# EAGLE board board1 (EAGLE 9.6.2)
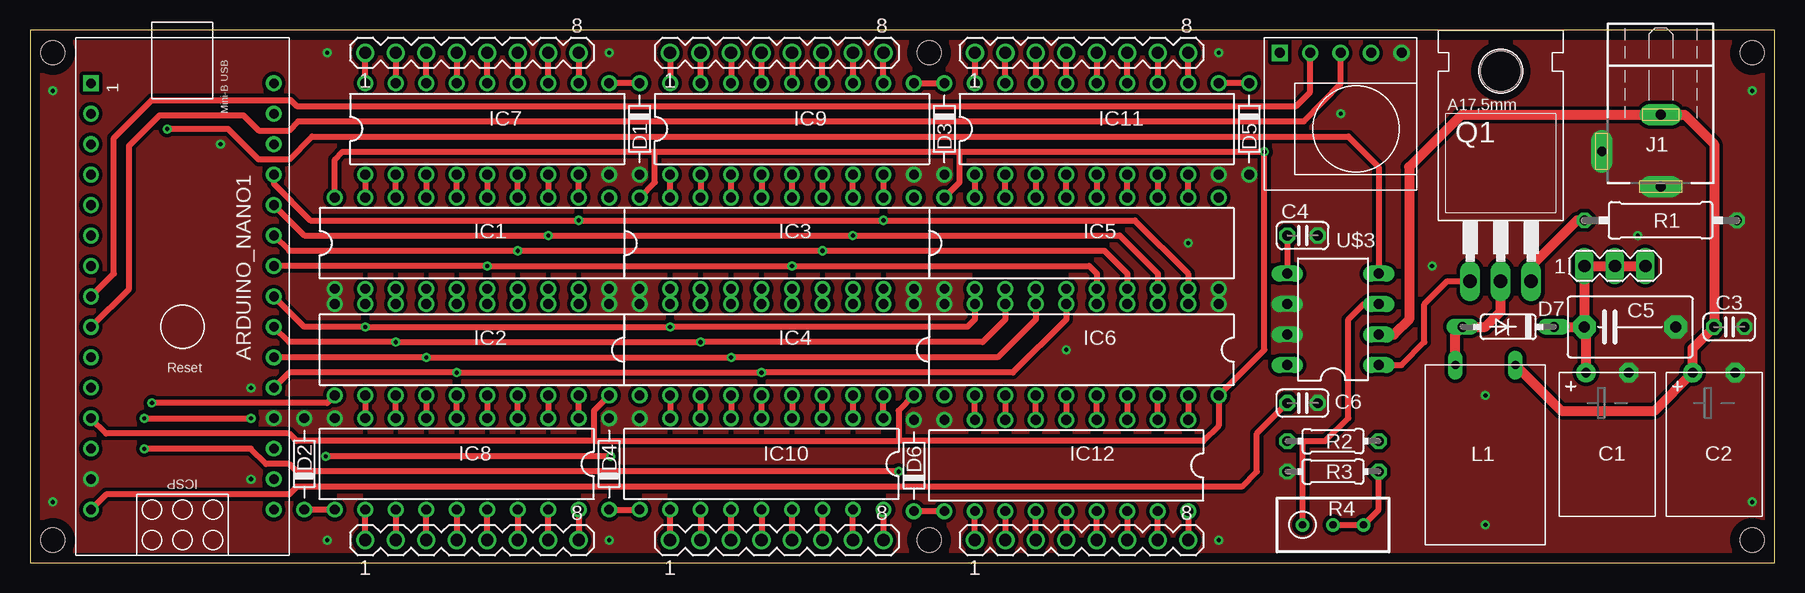
[diagram p0: board, top side]
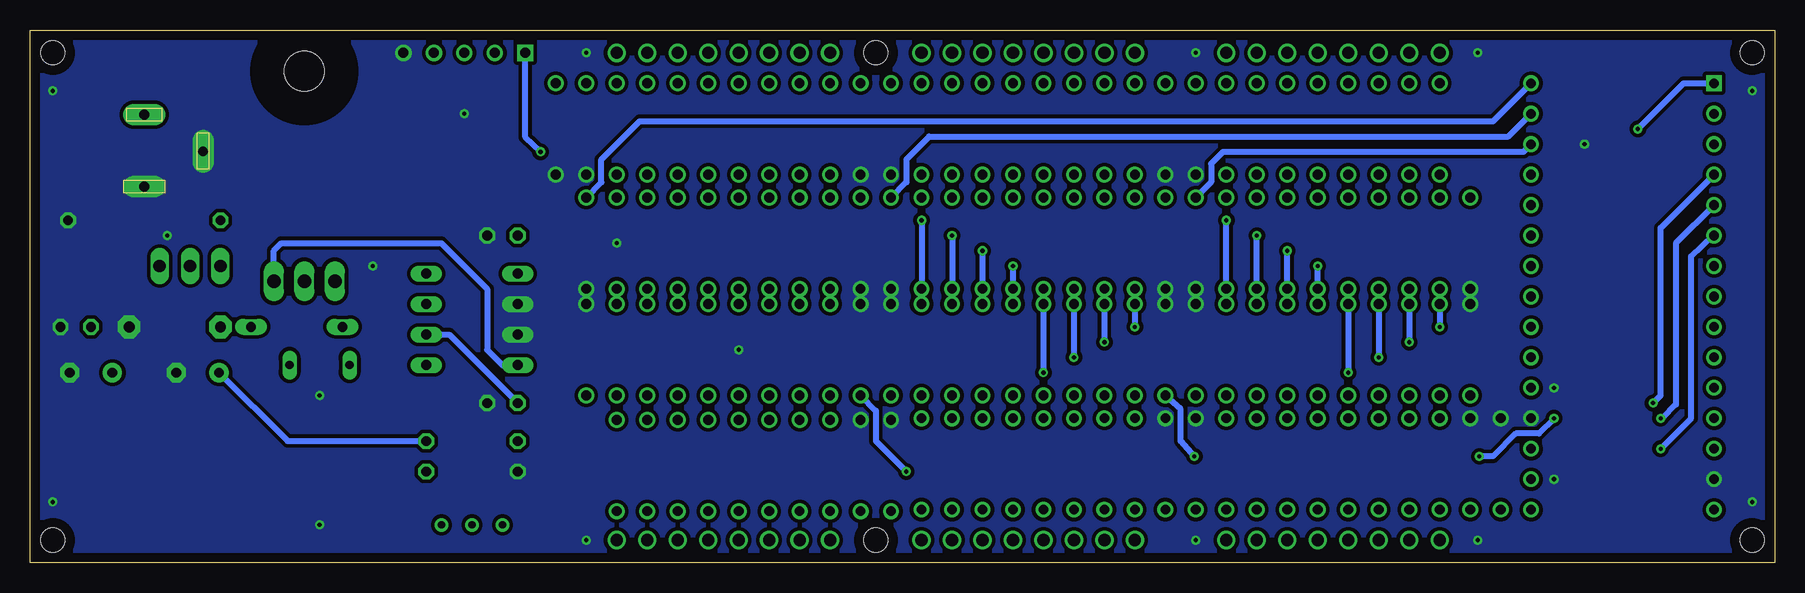
[diagram p1: board, bottom side, seen from below]

Size 145.41 x 44.45 mm. Coordinates in mm from the lower left corner, seen from the top.
Outline: 0,0 145.41,0 145.41,44.45 0,44.45 0,0
Copper layers (1*16): Top 0.035mm / dielectric 1.5mm / Bottom 0.035mm
Design rules "default *": minimum track width 6mil, minimum drill 0.35mm, track to track 6mil, track to pad 6mil, pad to pad 6mil, via to via 6mil, smd to smd 6mil, copper to edge 32mil, drill to drill 6mil, minimum pad ring 10mil, minimum via ring 8mil, stop-mask expansion 4mil, vias tented up to drill 0mil, thermal gap 10mil
Holes 2 mm at 1.91,1.91 1.91,42.55 143.51,42.55 143.51,1.91 74.93,42.55 74.93,1.91

## Footprints (pad centres in the part's own frame; a part is rotated, then mirrored left to right if it is on the bottom)
ARDUINO_NANO = drill 0.8 square: 1 -20.32,-7.62 | drill 0.8: 2 -17.78,-7.62; 3 -15.24,-7.62; 4 -12.7,-7.62; 5 -10.16,-7.62; 6 -7.62,-7.62; 7 -5.08,-7.62; 8 -2.54,-7.62; 9 0,-7.62; 10 2.54,-7.62; 11 5.08,-7.62; 12 7.62,-7.62; 13 10.16,-7.62; 14 12.7,-7.62; 15 15.24,-7.62; 16 15.24,7.62; 17 12.7,7.62; 18 10.16,7.62; 19 7.62,7.62; 20 5.08,7.62; 21 2.54,7.62; 22 0,7.62; 23 -2.54,7.62; 24 -5.08,7.62; 25 -7.62,7.62; 26 -10.16,7.62; 27 -12.7,7.62; 28 -15.24,7.62; 29 -17.78,7.62; 30 -20.32,7.62
E3,5-8 = drill 0.813 pad 1.6: + -1.778,0 | drill 0.813 pad 1.6 octagon: - 1.778,0
C025-024X044 = drill 0.813 octagon: 1 -1.27,0; 2 1.27,0
C7.5B5 = drill 0.914 pad 1.905 octagon: 1 -3.81,0; 2 3.81,0
D-7.5 = drill 0.813: A 3.81,0; C -3.81,0
DO35-7 = drill 0.813 long: A 3.81,0; C -3.81,0
DIL20 = drill 0.813: 1 -11.43,-3.81; 2 -8.89,-3.81; 3 -6.35,-3.81; 4 -3.81,-3.81; 5 -1.27,-3.81; 6 1.27,-3.81; 7 3.81,-3.81; 8 6.35,-3.81; 9 8.89,-3.81; 10 11.43,-3.81; 11 11.43,3.81; 12 8.89,3.81; 13 6.35,3.81; 14 3.81,3.81; 15 1.27,3.81; 16 -1.27,3.81; 17 -3.81,3.81; 18 -6.35,3.81; 19 -8.89,3.81; 20 -11.43,3.81
DIL18 = drill 0.813: 1 -10.16,-3.81; 2 -7.62,-3.81; 3 -5.08,-3.81; 4 -2.54,-3.81; 5 0,-3.81; 6 2.54,-3.81; 7 5.08,-3.81; 8 7.62,-3.81; 9 10.16,-3.81; 10 10.16,3.81; 11 7.62,3.81; 12 5.08,3.81; 13 2.54,3.81; 14 0,3.81; 15 -2.54,3.81; 16 -5.08,3.81; 17 -7.62,3.81; 18 -10.16,3.81
NEB21R = drill 0.813 pad 1.778 long: 1 0,7.35; 2 4.9,4.4; 3 0,1.35
BS11 = drill 0.7 long: 1 -2.5,0; 2 2.5,0
TO220 = drill 1.118 long: 1 -2.54,-6.35; 2 0,-6.35; 3 2.54,-6.35 | hole 3.302: 0,11.176
0309/12 = drill 0.813 octagon: 1 -6.35,0; 2 6.35,0
0204/7 = drill 0.813 octagon: 1 -3.81,0; 2 3.81,0
RTRIM3296W = drill 0.61: 1 0,-2.54; 2 0,0; 3 0,2.54
MA08-1 = drill 1.016: 1 -8.89,0; 2 -6.35,0; 3 -3.81,0; 4 -1.27,0; 5 1.27,0; 6 3.81,0; 7 6.35,0; 8 8.89,0
MA03-1 = drill 1.016 long: 1 -2.54,0; 2 0,0; 3 2.54,0
DS3231_MINI_MODULE = drill 0.85 square: 1 5.08,-5.08 | drill 0.85: 2 2.54,-5.08; 3 0,-5.08; 4 -2.54,-5.08; 5 -5.08,-5.08
DIL08 = drill 0.813 long: 1 -3.81,-3.81; 2 -1.27,-3.81; 3 1.27,-3.81; 4 3.81,-3.81; 5 3.81,3.81; 6 1.27,3.81; 7 -1.27,3.81; 8 -3.81,3.81

## Placement (x,y rotation side)
ARDUINO_NANO1  [ARDUINO_NANO]  12.7,19.68 270 top
C1  [E3,5-8]  131.44,15.88 180 bottom
C2  [E3,5-8]  140.34,15.88 180 bottom
C3  [C025-024X044]  141.6,19.68 0 top
C4  [C025-024X044]  106.05,27.3 0 top
C5  [C7.5B5]  133.35,19.68 0 top
C6  [C025-024X044]  106.05,13.34 0 top
D1  [D-7.5]  50.8,36.2 270 top
D2  [D-7.5]  22.86,8.26 90 top
D3  [D-7.5]  76.2,36.2 270 top
D4  [D-7.5]  48.26,8.26 90 top
D5  [D-7.5]  101.6,36.2 270 top
D6  [D-7.5]  73.66,8.13 90 top
D7  [DO35-7]  123.19,19.68 180 top
IC1  74HC573N  [DIL20]  36.83,26.67 0 top
IC2  74HC573N  [DIL20]  36.83,17.78 180 top
IC3  74HC573N  [DIL20]  62.23,26.67 0 top
IC4  74HC573N  [DIL20]  62.23,17.78 180 top
IC5  74HC573N  [DIL20]  87.63,26.67 0 top
IC6  74HC573N  [DIL20]  87.63,17.78 180 top
IC7  [DIL18]  38.1,36.2 0 top
IC8  [DIL18]  35.56,8.26 180 top
IC9  [DIL18]  63.5,36.2 0 top
IC10  [DIL18]  60.96,8.26 180 top
IC11  [DIL18]  88.9,36.2 0 top
IC12  [DIL18]  86.36,8.13 180 top
J1  NEB21R  [NEB21R]  135.89,38.73 180 top
L1  [BS11]  121.28,16.51 180 top
Q1  IRF620  [TO220]  122.56,29.84 0 top
R1  [0309/12]  135.89,28.57 180 top
R2  1M5  [0204/7]  108.58,10.16 0 top
R3  10k  [0204/7]  108.58,7.62 0 top
R4  5k  [RTRIM3296W]  108.58,3.17 270 top
SV1  [MA08-1]  36.83,42.55 0 top
SV2  [MA08-1]  36.83,1.91 0 top
SV3  [MA08-1]  62.23,42.55 0 top
SV4  [MA08-1]  62.23,1.91 0 top
SV5  [MA08-1]  87.63,42.55 0 top
SV6  [MA08-1]  87.63,1.91 0 top
SV7  [MA03-1]  132.08,24.77 0 top
U$1  DS3231_MINI_MODULE  [DS3231_MINI_MODULE]  109.22,37.47 180 top
U$3  MAX1771  [DIL08]  108.58,20.32 90 top

## Library data of the parts
ARDUINO_NANO1 = ArduinoNanoV30
C1 C2 = resistor-mod
C3 C4 C6 R1 R4 = resistor
C5 = capacitor-wima
D1-D6 = diode-mod
D7 = diode
IC1-IC6 = 74xx-eu-mod
IC7-IC11 = uln-udn-mod
IC12 = uln-udn-mod; SPICEPREFIX: X
J1 = con-lumberg; MPN: NEB 21 R; OC_FARNELL: 1217037; OC_NEWARK: 97K6458
L1 = inductor-neosid-mod; OC_FARNELL: unknown; OC_NEWARK: unknown
Q1 = transistor-fet
R2 R3 = rcl; SPICEPREFIX: R
SV1-SV6 = con-lstb-mod; OC_FARNELL: unknown; OC_NEWARK: unknown
SV7 = con-lstb; OC_FARNELL: unknown; OC_NEWARK: unknown
U$1 = random
U$3 = maxim

## Nets
+12V: ARDUINO_NANO1.15 C2.+ C3.1 C6.1 J1.3 L1.1 U$3.2
CS1: ARDUINO_NANO1.28 IC1.11
CS2: ARDUINO_NANO1.4 IC2.11
CS3: ARDUINO_NANO1.29 IC3.11
CS4: ARDUINO_NANO1.5 IC4.11
CS5: ARDUINO_NANO1.30 IC5.11
CS6: ARDUINO_NANO1.6 IC6.11
D1: ARDUINO_NANO1.23 IC1.2 IC2.9 IC3.2 IC4.9 IC5.2 IC6.9
D2: ARDUINO_NANO1.22 IC1.3 IC2.8 IC3.3 IC4.8 IC5.3 IC6.8
D3: ARDUINO_NANO1.21 IC1.4 IC2.7 IC3.4 IC4.7 IC5.4 IC6.7
D4: ARDUINO_NANO1.20 IC1.5 IC2.6 IC3.5 IC4.6 IC5.5 IC6.6
D5: ARDUINO_NANO1.24 IC1.6 IC2.5 IC3.6 IC4.5 IC5.6 IC6.5
D6: ARDUINO_NANO1.25 IC1.7 IC2.4 IC3.7 IC4.4 IC5.7 IC6.4
D7: ARDUINO_NANO1.26 IC1.8 IC2.3 IC3.8 IC4.3 IC5.8 IC6.3
D8: ARDUINO_NANO1.27 IC1.9 IC2.2 IC3.9 IC4.2 IC5.9 IC6.2
GND: ARDUINO_NANO1.14 ARDUINO_NANO1.19 C1.- C2.- C3.2 C4.2 C5.2 C6.2 D1.A D2.A D3.A D4.A D5.A D6.A IC1.1 IC1.10 IC2.1 IC2.10 IC3.1 IC3.10 IC4.1 IC4.10 IC5.1 IC5.10 IC6.1 IC6.10 IC7.9 IC8.9 IC9.9 IC10.9 IC11.9 IC12.9 J1.1 J1.2 R1.1 R3.1 U$1.5 U$3.6 U$3.7
HV: C1.+ C5.1 D7.C R2.2 SV7.1 SV7.2 SV7.3
N$1: IC2.19 IC8.1
N$2: IC2.18 IC8.2
N$3: IC2.17 IC8.3
N$4: IC2.16 IC8.4
N$5: IC2.15 IC8.5
N$6: IC2.14 IC8.6
N$7: IC2.13 IC8.7
N$8: IC2.12 IC8.8
N$9: IC1.19 IC7.1
N$10: IC1.18 IC7.2
N$11: IC1.17 IC7.3
N$12: IC1.16 IC7.4
N$13: IC1.15 IC7.5
N$14: IC1.14 IC7.6
N$15: IC1.13 IC7.7
N$16: IC1.12 IC7.8
N$17: IC3.19 IC9.1
N$18: IC3.18 IC9.2
N$19: IC3.17 IC9.3
N$20: IC3.16 IC9.4
N$21: IC3.15 IC9.5
N$22: IC3.14 IC9.6
N$23: IC3.13 IC9.7
N$24: IC3.12 IC9.8
N$25: IC4.19 IC10.1
N$26: IC4.18 IC10.2
N$27: IC4.17 IC10.3
N$28: IC4.16 IC10.4
N$29: IC4.15 IC10.5
N$30: IC4.14 IC10.6
N$31: IC4.13 IC10.7
N$32: IC4.12 IC10.8
N$33: IC5.19 IC11.1
N$34: IC5.18 IC11.2
N$35: IC5.17 IC11.3
N$36: IC5.16 IC11.4
N$37: IC5.15 IC11.5
N$38: IC5.14 IC11.6
N$39: IC5.13 IC11.7
N$40: IC5.12 IC11.8
N$41: IC6.19 IC12.1
N$42: IC6.18 IC12.2
N$43: IC6.17 IC12.3
N$44: IC6.16 IC12.4
N$45: IC6.15 IC12.5
N$46: IC6.14 IC12.6
N$47: IC6.13 IC12.7
N$48: IC6.12 IC12.8
N$49: IC7.18 SV1.1
N$50: IC7.17 SV1.2
N$51: IC7.16 SV1.3
N$52: IC7.15 SV1.4
N$53: IC7.14 SV1.5
N$54: IC7.13 SV1.6
N$55: IC7.12 SV1.7
N$56: IC7.11 SV1.8
N$57: IC8.18 SV2.8
N$58: IC8.17 SV2.7
N$59: IC8.16 SV2.6
N$60: IC8.15 SV2.5
N$61: IC8.14 SV2.4
N$62: IC8.13 SV2.3
N$63: IC8.12 SV2.2
N$64: IC8.11 SV2.1
N$65: IC9.18 SV3.1
N$66: IC9.17 SV3.2
N$67: IC9.16 SV3.3
N$68: IC9.15 SV3.4
N$69: IC9.14 SV3.5
N$70: IC9.13 SV3.6
N$71: IC9.12 SV3.7
N$72: IC9.11 SV3.8
N$73: IC10.18 SV4.8
N$74: IC10.17 SV4.7
N$75: IC10.16 SV4.6
N$76: IC10.15 SV4.5
N$77: IC10.14 SV4.4
N$78: IC10.13 SV4.3
N$79: IC10.12 SV4.2
N$80: IC10.11 SV4.1
N$81: IC11.18 SV5.1
N$82: IC11.17 SV5.2
N$83: IC11.16 SV5.3
N$84: IC11.15 SV5.4
N$85: IC11.14 SV5.5
N$86: IC11.13 SV5.6
N$87: IC11.12 SV5.7
N$88: IC11.11 SV5.8
N$89: IC12.18 SV6.8
N$90: IC12.17 SV6.7
N$91: IC12.16 SV6.6
N$92: IC12.15 SV6.5
N$93: IC12.14 SV6.4
N$94: IC12.13 SV6.3
N$95: IC12.12 SV6.2
N$96: IC12.11 SV6.1
N$97: ARDUINO_NANO1.8 U$1.2
N$98: D1.C IC7.10
N$99: ARDUINO_NANO1.9 U$1.3
N$100: D2.C IC8.10
N$102: D3.C IC9.10
N$104: D4.C IC10.10
N$105: C4.1 U$3.5
N$106: D5.C IC11.10
N$107: Q1.1 U$3.1
N$108: D6.C IC12.10
N$109: D7.A L1.2 Q1.2
N$110: Q1.3 R1.2 U$3.8
N$112: R2.1 R4.1 U$3.3
N$113: R3.2 R4.2 R4.3
SHDN: ARDUINO_NANO1.1 U$3.4
VCC: ARDUINO_NANO1.12 IC1.20 IC2.20 IC3.20 IC4.20 IC5.20 IC6.20 U$1.1

## Tracks (layer width: path | path; a pad name or v marks a point on that pad's centre or on a via)
+12V
  Top 0.508: ARDUINO_NANO1.15 6.35,5.71 21.59,5.71 22.23,6.35 100.97,6.35 102.23,7.62 102.23,10.79 C6.1
  Top 0.813: L1.1 127.59,12.7 135.38,12.7 C2.+ 138.56,17.91 C3.1 140.34,34.92 137.88,37.38 J1.3 119.3,37.38 114.94,33.02 114.94,20.32 113.67,19.05 U$3.2
  Bottom 0.508: U$3.2 110.49,19.05 C6.1
CS1
  Bottom 0.508: IC1.11 46.99,31.75 46.99,33.28 45.98,34.29 20.95,34.29 ARDUINO_NANO1.28
CS2  (via drill 0.35)
  Top 0.508: IC2.11 24.77,13.34 v10.16,13.34
  Bottom 0.508: ARDUINO_NANO1.4 9.53,27.94 9.53,13.97 v10.16,13.34
CS3
  Bottom 0.508: IC3.11 72.39,31.75 72.39,33.66 70.48,35.56 22.23,35.56 ARDUINO_NANO1.29
CS4  (via drill 0.35)
  Top 0.508: v48.39,8.89 v24.64,8.89 | v9.53,12.06 v18.41,12.06
  Bottom 0.508: ARDUINO_NANO1.5 8.26,26.67 8.26,13.21 9.4,12.06 v9.53,12.06 | IC4.11 49.53,12.83 49.53,10.16 v48.39,8.89 | v24.64,8.89 23.5,8.89 21.59,10.79 19.68,10.79 v18.41,12.06
CS5
  Bottom 0.508: IC5.11 97.79,31.75 97.79,33.66 94.61,36.83 23.5,36.83 ARDUINO_NANO1.30
CS6  (via drill 0.35)
  Top 0.508: v72.39,7.62 22.23,7.62 21.59,8.26 19.68,8.26 18.41,9.53 v9.53,9.53
  Bottom 0.508: IC6.11 74.93,12.7 74.93,10.16 v72.39,7.62 | v9.53,9.53 6.99,12.06 6.99,25.57 5.16,27.3 ARDUINO_NANO1.6
D1  (via drill 0.35)
  Top 0.508: IC5.2 IC6.9 78.74,20.32 78.11,19.68 v53.34,19.68 v27.94,19.68 22.86,19.68 ARDUINO_NANO1.23 | IC1.2 IC2.9 | IC4.9 IC3.2
  Bottom 0.508: IC2.9 v27.94,19.68 | IC4.9 v53.34,19.68
D2  (via drill 0.35)
  Top 0.508: IC5.3 IC6.8 81.28,20.32 79.38,18.41 v55.88,18.41 v30.48,18.41 21.59,18.41 ARDUINO_NANO1.22 | IC2.8 IC1.3 | IC3.3 IC4.8
  Bottom 0.508: IC2.8 v30.48,18.41 | IC4.8 v55.88,18.41
D3  (via drill 0.35)
  Top 0.508: IC5.4 IC6.7 83.82,20.32 80.64,17.14 v58.42,17.14 v33.02,17.14 ARDUINO_NANO1.21 | IC1.4 IC2.7 | IC4.7 IC3.4
  Bottom 0.508: IC2.7 v33.02,17.14 | IC4.7 v58.42,17.14
D4  (via drill 0.35)
  Top 0.508: IC5.5 IC6.6 86.36,20.32 81.92,15.88 v60.96,15.88 v35.56,15.88 21.59,15.88 ARDUINO_NANO1.20 | IC2.6 IC1.5 | IC3.5 IC4.6
  Bottom 0.508: IC2.6 v35.56,15.88 | IC4.6 v60.96,15.88
D5  (via drill 0.35)
  Top 0.508: IC6.5 IC5.6 88.9,24.13 88.27,24.77 v63.5,24.77 v38.1,24.77 ARDUINO_NANO1.24 | IC1.6 IC2.5 | IC4.5 IC3.6
  Bottom 0.508: v63.5,24.77 IC3.6 | IC1.6 v38.1,24.77
D6  (via drill 0.35)
  Top 0.508: IC6.4 IC5.7 91.44,24.13 89.53,26.04 v66.04,26.04 v40.64,26.04 21.59,26.04 ARDUINO_NANO1.25 | IC2.4 IC1.7 | IC3.7 IC4.4
  Bottom 0.508: v66.04,26.04 IC3.7 | IC1.7 v40.64,26.04
D7  (via drill 0.35)
  Top 0.508: IC6.3 IC5.8 93.98,24.13 90.81,27.3 v68.58,27.3 v43.18,27.3 22.86,27.3 ARDUINO_NANO1.26 | IC1.8 IC2.3 | IC4.3 IC3.8
  Bottom 0.508: v68.58,27.3 IC3.8 | IC1.8 v43.18,27.3
D8  (via drill 0.35)
  Top 0.508: IC6.2 IC5.9 96.52,24.13 92.08,28.57 v71.12,28.57 v45.72,28.57 23.37,28.57 20.32,31.62 ARDUINO_NANO1.27 | IC2.2 IC1.9 | IC3.9 IC4.2
  Bottom 0.508: v71.12,28.57 IC3.9 | IC1.9 v45.72,28.57
GND  (via drill 0.35)
  other vias: 1.91,5.08 1.91,39.37 24.77,42.55 24.77,1.91 86.36,17.78 96.52,26.67 121.28,3.17 99.06,42.55 109.22,37.47 116.84,24.77 121.28,13.97 143.51,5.08 133.99,27.3 143.51,39.37 15.88,34.92 18.41,14.61 18.41,6.99 99.06,1.91 48.26,42.55 48.26,1.91
  pour Bottom (isolate 0.305, no thermals): 0,0 145.41,0 145.41,44.45 0,44.45
  pour Top (isolate 0.305, rank 6, no thermals): 0,0 0,44.45 145.41,44.45 145.41,0
HV
  Top 0.813: SV7.3 SV7.2 SV7.1 C5.1 | D7.C C5.1 | C1.+ 129.67,19.49 C5.1
  Bottom 0.508: C1.+ 123.95,10.16 R2.2
N$1
  Top 0.508: IC8.1 IC2.19
N$2
  Top 0.508: IC2.18 IC8.2
N$3
  Top 0.508: IC8.3 IC2.17
N$4
  Top 0.508: IC2.16 IC8.4
N$5
  Top 0.508: IC8.5 IC2.15
N$6
  Top 0.508: IC2.14 IC8.6
N$7
  Top 0.508: IC8.7 IC2.13
N$8
  Top 0.508: IC2.12 IC8.8
N$9
  Top 0.508: IC7.1 IC1.19
N$10
  Top 0.508: IC1.18 IC7.2
N$11
  Top 0.508: IC7.3 IC1.17
N$12
  Top 0.508: IC1.16 IC7.4
N$13
  Top 0.508: IC7.5 IC1.15
N$14
  Top 0.508: IC1.14 IC7.6
N$15
  Top 0.508: IC7.7 IC1.13
N$16
  Top 0.508: IC1.12 IC7.8
N$17
  Top 0.508: IC3.19 IC9.1
N$18
  Top 0.508: IC9.2 IC3.18
N$19
  Top 0.508: IC3.17 IC9.3
N$20
  Top 0.508: IC9.4 IC3.16
N$21
  Top 0.508: IC3.15 IC9.5
N$22
  Top 0.508: IC9.6 IC3.14
N$23
  Top 0.508: IC3.13 IC9.7
N$24
  Top 0.508: IC9.8 IC3.12
N$25
  Top 0.508: IC10.1 IC4.19
N$26
  Top 0.508: IC4.18 IC10.2
N$27
  Top 0.508: IC10.3 IC4.17
N$28
  Top 0.508: IC4.16 IC10.4
N$29
  Top 0.508: IC10.5 IC4.15
N$30
  Top 0.508: IC4.14 IC10.6
N$31
  Top 0.508: IC10.7 IC4.13
N$32
  Top 0.508: IC4.12 IC10.8
N$33
  Top 0.508: IC11.1 IC5.19
N$34
  Top 0.508: IC5.18 IC11.2
N$35
  Top 0.508: IC11.3 IC5.17
N$36
  Top 0.508: IC5.16 IC11.4
N$37
  Top 0.508: IC11.5 IC5.15
N$38
  Top 0.508: IC5.14 IC11.6
N$39
  Top 0.508: IC11.7 IC5.13
N$40
  Top 0.508: IC5.12 IC11.8
N$41
  Top 0.508: IC6.19 IC12.1
N$42
  Top 0.508: IC12.2 IC6.18
N$43
  Top 0.508: IC6.17 IC12.3
N$44
  Top 0.508: IC12.4 IC6.16
N$45
  Top 0.508: IC6.15 IC12.5
N$46
  Top 0.508: IC12.6 IC6.14
N$47
  Top 0.508: IC6.13 IC12.7
N$48
  Top 0.508: IC12.8 IC6.12
N$49
  Top 0.508: IC7.18 SV1.1
N$50
  Top 0.508: SV1.2 IC7.17
N$51
  Top 0.508: IC7.16 SV1.3
N$52
  Top 0.508: SV1.4 IC7.15
N$53
  Top 0.508: IC7.14 SV1.5
N$54
  Top 0.508: SV1.6 IC7.13
N$55
  Top 0.508: IC7.12 SV1.7
N$56
  Top 0.508: SV1.8 IC7.11
N$57
  Top 0.508: IC8.18 SV2.8
N$58
  Top 0.508: SV2.7 IC8.17
N$59
  Top 0.508: IC8.16 SV2.6
N$60
  Top 0.508: SV2.5 IC8.15
N$61
  Top 0.508: IC8.14 SV2.4
N$62
  Top 0.508: SV2.3 IC8.13
N$63
  Top 0.508: IC8.12 SV2.2
N$64
  Top 0.508: SV2.1 IC8.11
N$65
  Top 0.508: SV3.1 IC9.18
N$66
  Top 0.508: IC9.17 SV3.2
N$67
  Top 0.508: SV3.3 IC9.16
N$68
  Top 0.508: IC9.15 SV3.4
N$69
  Top 0.508: SV3.5 IC9.14
N$70
  Top 0.508: IC9.13 SV3.6
N$71
  Top 0.508: SV3.7 IC9.12
N$72
  Top 0.508: IC9.11 SV3.8
N$73
  Top 0.508: IC10.18 SV4.8
N$74
  Top 0.508: SV4.7 IC10.17
N$75
  Top 0.508: IC10.16 SV4.6
N$76
  Top 0.508: SV4.5 IC10.15
N$77
  Top 0.508: IC10.14 SV4.4
N$78
  Top 0.508: SV4.3 IC10.13
N$79
  Top 0.508: IC10.12 SV4.2
N$80
  Top 0.508: SV4.1 IC10.11
N$81
  Top 0.508: SV5.1 IC11.18
N$82
  Top 0.508: IC11.17 SV5.2
N$83
  Top 0.508: SV5.3 IC11.16
N$84
  Top 0.508: IC11.15 SV5.4
N$85
  Top 0.508: SV5.5 IC11.14
N$86
  Top 0.508: IC11.13 SV5.6
N$87
  Top 0.508: SV5.7 IC11.12
N$88
  Top 0.508: IC11.11 SV5.8
N$89
  Top 0.508: IC12.18 SV6.8
N$90
  Top 0.508: SV6.7 IC12.17
N$91
  Top 0.508: IC12.16 SV6.6
N$92
  Top 0.508: SV6.5 IC12.15
N$93
  Top 0.508: IC12.14 SV6.4
N$94
  Top 0.508: SV6.3 IC12.13
N$95
  Top 0.508: IC12.12 SV6.2
N$96
  Top 0.508: SV6.1 IC12.11
N$97
  Top 0.508: ARDUINO_NANO1.8 6.99,24.13 6.99,35.43 10.16,38.61 21.72,38.61 22.23,38.1 105.54,38.1 106.68,39.28 U$1.2
N$98
  Top 0.508: D1.C IC7.10
N$99
  Top 0.508: ARDUINO_NANO1.9 8.26,22.86 8.26,34.8 10.79,37.34 17.78,37.34 19.05,36.07 21.59,36.07 22.35,36.83 106.17,36.83 109.22,39.96 U$1.3
N$100
  Top 0.508: IC8.10 D2.C
N$102
  Top 0.508: IC9.10 D3.C
N$104
  Top 0.508: D4.C IC10.10
N$105
  Top 0.508: C4.1 U$3.5
N$106
  Top 0.508: D5.C IC11.10
N$107
  Top 0.508: U$3.1 114.3,16.51 116.2,18.41 116.2,21.59 118.11,23.5 Q1.1
N$108
  Top 0.508: IC12.10 D6.C
N$109
  Top 0.813: L1.2 118.78,19.09 D7.A 121.28,19.68 122.56,20.95 Q1.2
N$110
  Top 0.813: Q1.3 125.09,24.77 128.91,28.57 R1.2
  Bottom 0.508: Q1.3 125.09,26.04 124.46,26.67 111.12,26.67 107.31,22.86 107.31,17.78 106.05,16.51 U$3.8
N$112
  Top 0.508: R2.1 106.05,10.16 | 106.05,10.16 107.95,10.16 109.86,12.06 109.86,20.32 111.12,21.59 U$3.3 | R4.1 106.05,10.16
N$113
  Top 0.508: R3.2 112.39,4.45 R4.3 R4.2
SHDN  (via drill 0.35)
  Top 0.508: v11.43,36.2 16.51,36.2 19.05,33.66 21.59,33.66 23.5,35.56 109.86,35.56 112.39,33.02 U$3.4
  Bottom 0.508: v11.43,36.2 7.62,40.01 ARDUINO_NANO1.1
VCC  (via drill 0.35)
  Top 0.508: IC1.20 25.4,33.66 26.04,34.29 52.07,34.29 | 72.39,10.16 97.79,10.16 99.06,11.43 IC6.20 102.87,17.78 v102.87,34.29 77.47,34.29 | IC2.20 46.99,12.7 46.99,10.16 | 46.99,10.16 72.39,10.16 | IC3.20 52.07,31.75 52.07,34.29 | IC4.20 72.39,12.7 72.39,10.16 | IC5.20 77.47,31.75 77.47,34.29 | 52.07,34.29 77.47,34.29 | 46.99,10.16 22.23,10.16 21.59,10.79 6.35,10.79 ARDUINO_NANO1.12
  Bottom 0.508: v102.87,34.29 104.14,35.51 U$1.1